# Altium PCB Demo1.PcbDoc
Units mil, origin at the board's own origin, x right, y up, seen from the top; angles counter-clockwise.
Board outline 2590 x 2195 mil, 2 copper layers (Top Layer, Bottom Layer); 9 components, 11 nets, 27 pads, 0 vias.
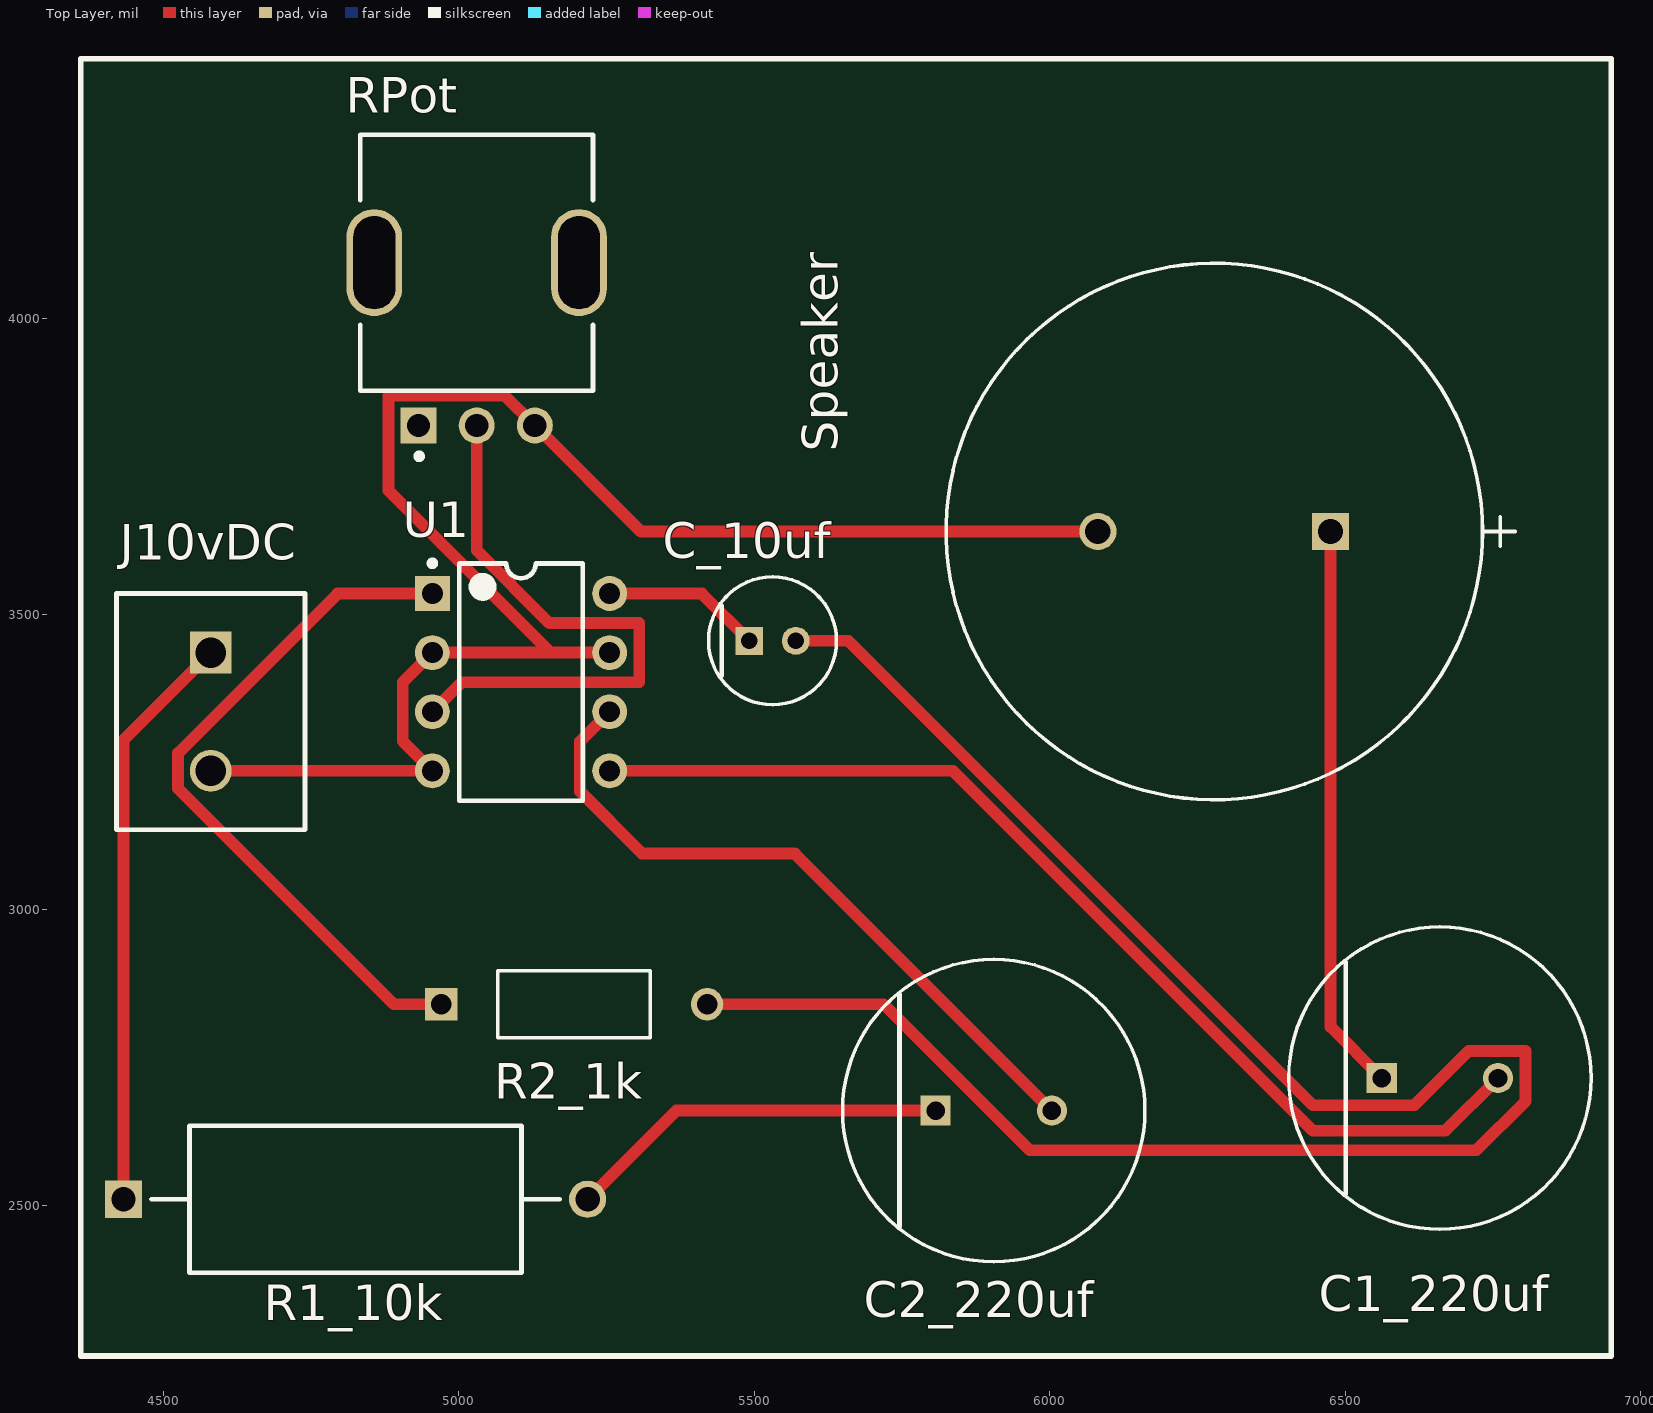
[diagram p0: Top Layer view]
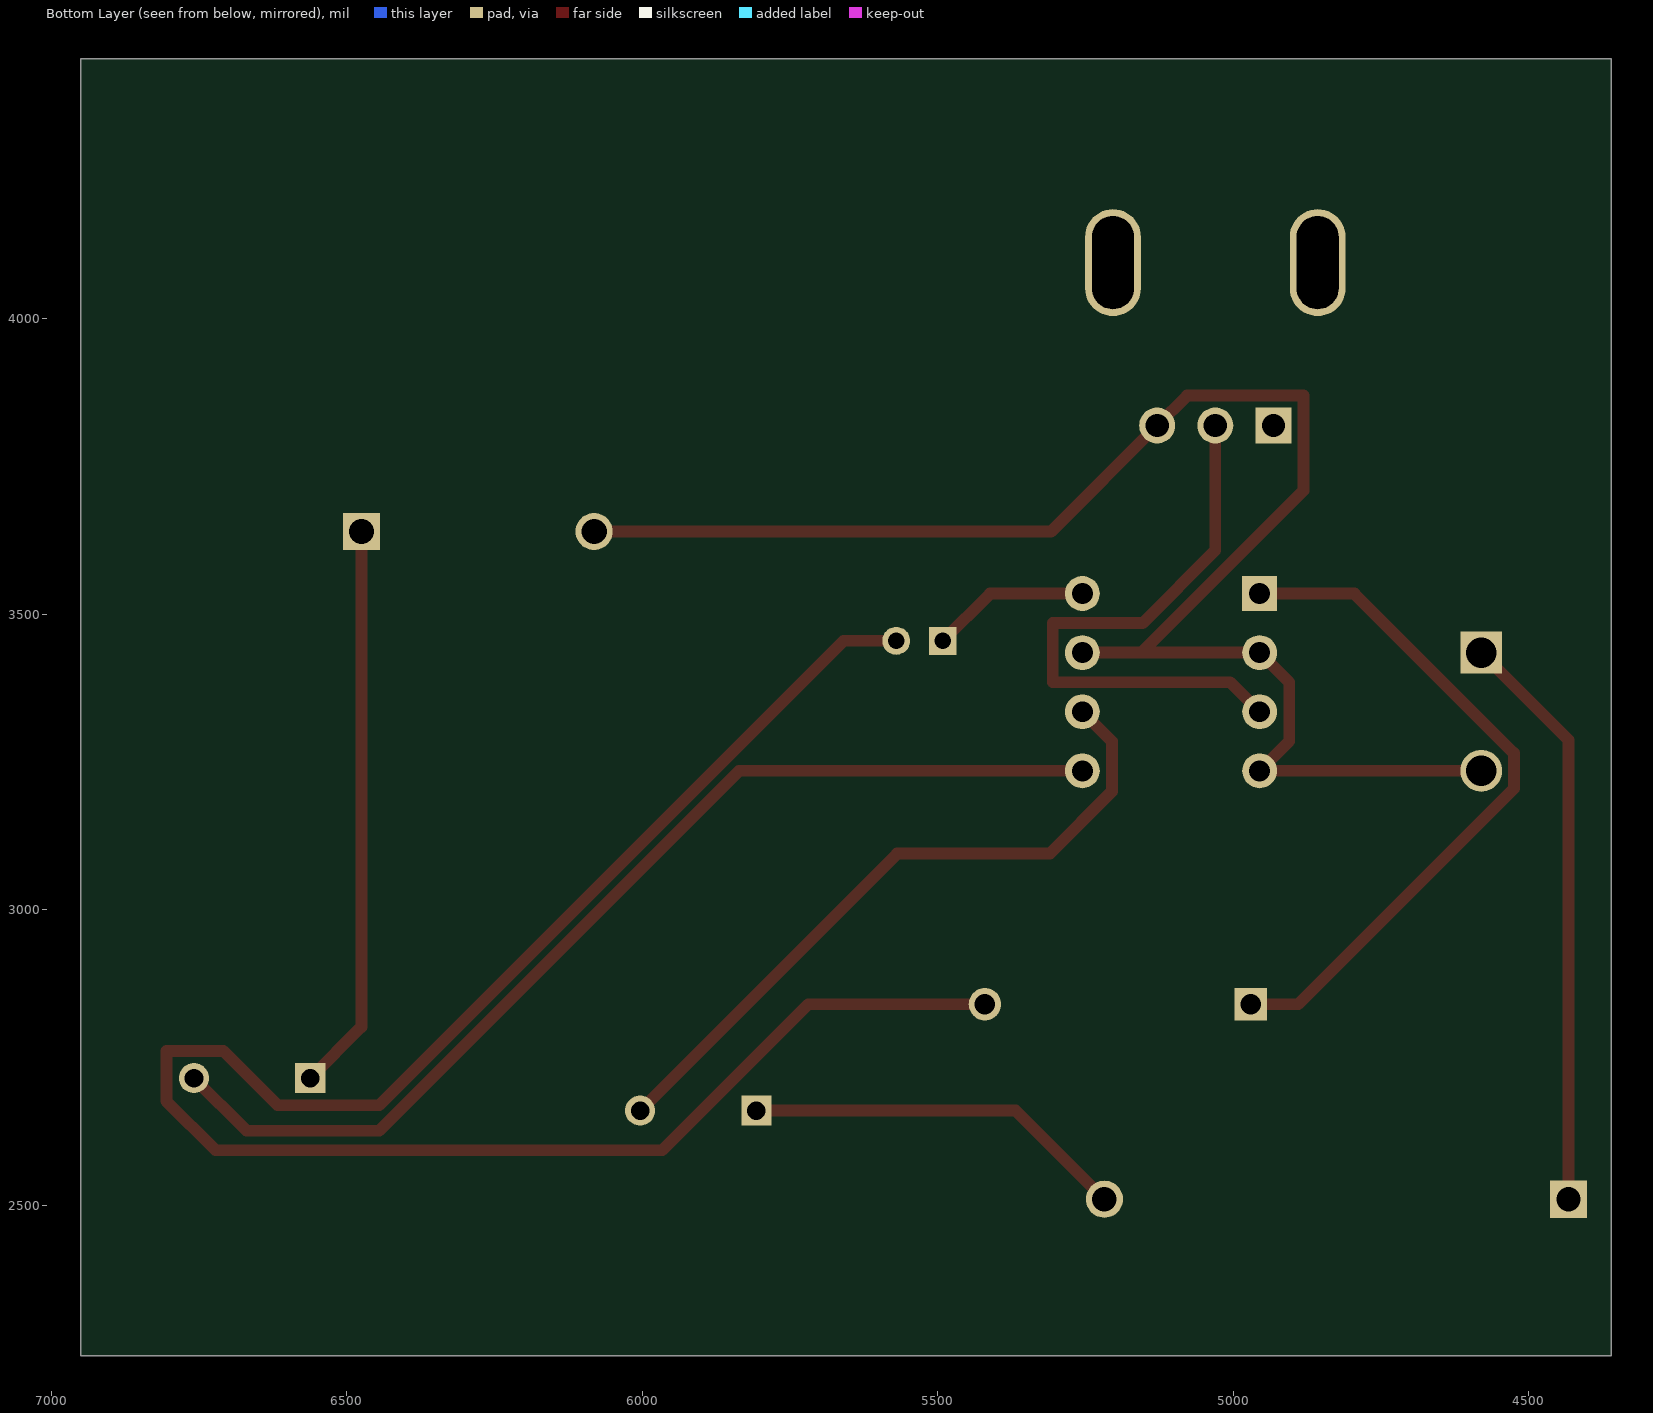
[diagram p1: Bottom Layer view, seen from below]
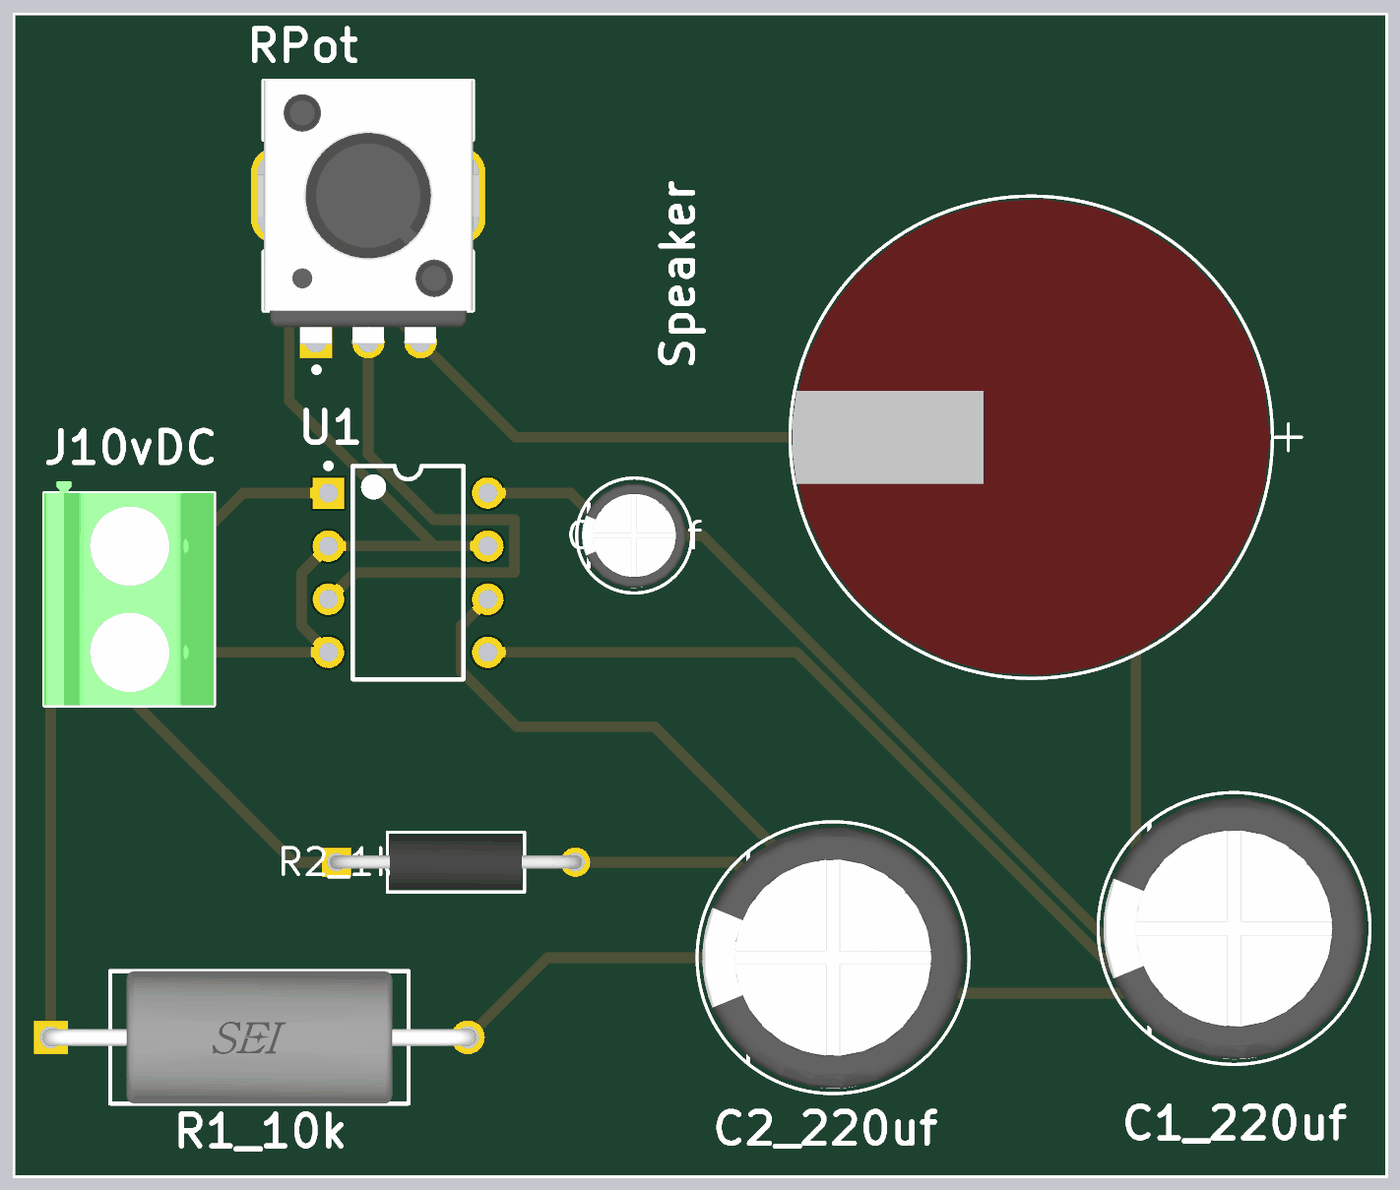
[diagram p2: 3D render of the assembled board from above, using the file's embedded part models]

## Layer stack, top to bottom
Top Solder: solder mask 0.4, Solder Resist, Dk 3.5
Top Layer: signal copper 1.4
Dielectric 1: dielectric 12.6, FR-4, Dk 4.8
Bottom Layer: signal copper 1.4
Bottom Solder: solder mask 0.4, Solder Resist, Dk 3.5

## Board outline
4360,2245 4360,4440 6950,4440 6950,2245

## Design rules (kind name [scope] priority, off if disabled: settings)
Clearance [All] p1: gap=10 ignorepadtopadclearanceinfootprint=FALSE except(0: Arc-Hole Track-Hole SMDPad-Hole THPad-Hole Via-Hole Fill-Hole Poly-Hole Region-Hole Text-Hole)
PolygonConnect [All] p1: connectstyle=Relief reliefconductorwidth=10 reliefentries=4 polygonreliefangle="90 Angle" airgapwidth=10
RoutingVias [All] p1: holewidth=28 width=50 viastyle="Through Hole" minholewidth=28 minwidth=50 maxholewidth=28 maxwidth=50
SolderMaskExpansion [All] p1: expansion=4 istentingtop=FALSE
Width [All] p1: maxlimit=20 minlimit=20 preferedwidth=20 minimp=50.000000 maximp=50.000000 favimp=50.000000
30 further rules are at their usual default settings.

## Components (designator, comment, footprint, x,y, rotation, side; value= is the part's Value field where it differs from the comment)
C1_220uf "ECA2AHG221B" FP-RAD-TH-D_12_5_0_5-L_25-MFG 6660,2715 r0 top
C2_220uf "ECA2AHG221B" FP-RAD-TH-D_12_5_0_5-L_25-MFG 5905,2660 r0 top
C_10uf "ECA1HHG100I" FP-RAD-TH-D_5_0_5-L_11_1-MFG 5530.63,3455 r0 top
J10vDC "1729128" PHOE-1729128-2_V 4580,3335 r270 top
R1_10k "SP3AJT10R0" FP-SP3A-MFG 4825,2510 r0 top
R2_1k "CF14JT1K00" STA_CF14_STP 4970,2840 r0 top
RPot "PTV09A-4225F-B103" FP-PTV09A-4-MFG 5030,4095 r0 top
Speaker "SM231508-1" SPEAK_SM231508-1_DBU 6475,3640 r180 top
U1 "LM386N-1/NOPB" P0008A 5105,3385 r0 top

## Footprints (in the part's own frame and the unit in brackets; to place one, negate y for a bottom-side part, rotate by r counter-clockwise, add the part's x,y. Pads: shape width x height; smd on the part's side, far side on the other; paste and mask are expansions set on the pad)
FP-PTV09A-4-MFG [mm]
  rect 1.55x1.55 hole 1 paste-1000 mask+0: 1(-2.5,-7)
  round 1.55 hole 1 paste-1000 mask+0: 2(0,-7) 3(2.5,-7)
  rrect100% 2.4x4.6 hole 4 slot 1.8 at 0 deg paste-1000 mask+0: 4(-4.4,0) 5(4.4,0)
  silkscreen extent -5,-8.45 5,5.5, body extent -5.8,-7.88 5.8,5.6, height 0.25
FP-RAD-TH-D_5_0_5-L_11_1-MFG [mm]
  rect 1.2x1.2 hole 0.7 paste-1000 mask+0: 1(-1,0)
  round 1.2 hole 0.7 paste-1000 mask+0: 2(1,0)
  silkscreen extent -2.75,-2.75 2.75,2.75, body extent -2.85,-2.85 2.85,2.85, height 0.25
FP-RAD-TH-D_12_5_0_5-L_25-MFG [mm]
  rect 1.3x1.3 hole 0.8 paste-1000 mask+0: 1(-2.5,0)
  round 1.3 hole 0.8 paste-1000 mask+0: 2(2.5,0)
  silkscreen extent -6.5,-6.5 6.5,6.5, body extent -6.6,-6.6 6.6,6.6, height 0.25
FP-SP3A-MFG [mm]
  rect 1.6x1.6 hole 1.05 paste-1000 mask+0: 1(-9.973,0)
  round 1.6 hole 1.05 paste-1000 mask+0: 2(9.973,0)
  silkscreen extent -8.77,-3.16 8.77,3.16, body extent -10.87,-3.26 10.87,3.26, height 0.25
P0008A [mm] "DIP, 8-Leads, Body 10.15x6.6mm, Pitch 2.54mm"
  rect 1.5x1.5 hole 0.9: 1(-3.81,3.81)
  round 1.5 hole 0.9: 2(-3.81,1.27) 3(-3.81,-1.27) 4(-3.81,-3.81) 5(3.81,-3.81) 6(3.81,-1.27) 7(3.81,1.27) 8(3.81,3.81)
  silkscreen extent -3.93,-5.1 2.65,5.23, body extent -3.95,-5.07 3.95,5.07, height 5.08
PHOE-1729128-2_V [mm] "Receptacle, 2-Leads, Body 8.1x10.16mm, Pitch 5.08mm"
  rect 1.8x1.8 hole 1.3: 1(-2.54,0)
  round 1.8 hole 1.3: 2(2.54,0)
  silkscreen extent -5.08,-4.05 5.08,4.05, body extent -5.65,-4.05 5.08,4.05, height 10.01
SPEAK_SM231508-1_DBU [mil]
  rect 63x63 hole 43 mask+0: 1(0,0)
  round 63 hole 43 mask+0: 2(393.7,0)
  silkscreen extent -312,-454 651,454, body extent -252,-449 647,449, height 316
STA_CF14_STP [mil]
  rect 55x55 hole 35 mask+0: 1(0,0)
  round 55 hole 35 mask+0: 2(450,0)
  silkscreen extent 96,-56 354,56, body extent -12,-51 462,51, height 103

## Part data
C1_220uf C2_220uf: library part CMP-05427-001770-1, "Aluminum Electrolytic Capacitors (Radial Lead Type) AEC-Q200 Qualified 220uF ±20% 100V", Capacitance=220uF, Case/Package=Radial, Max Operating Temperature=105°C, Min Operating Temperature=-55°C, Package Quantity=500, Ripple Current=440mA, Tolerance=20%, Voltage Rating=100V, Diameter=12.5mm, Height=25mm, Height - Seated (Max)=1.063inch, Lead Diameter=0.6mm, Lead Pitch=5mm, Lead/Base Style=Straight, Length=25mm, Life (Hours)=2000Hour, Mount="Through Hole", Packaging="Ammo Pack", Radiation Hardening=No, RoHS Compliant=Yes, Series=NHG, Termination=Radial, Voltage Rating (DC)=100V, Width=12.5mm
C_10uf: library part CMP-05427-000260-1, "Aluminum Electrolytic Capacitors (Radial Lead Type) AEC-Q200 Qualified 10uF ±20% 50V", Capacitance=10uF, Case/Package=Radial, Leakage Current=3uA, Max Operating Temperature=105°C, Min Operating Temperature=-55°C, Package Quantity=2000, Ripple Current=39mA, Tolerance=20%, Voltage Rating=50V, Construction=RADIAL, Contact Plating=Tin, Diameter=5mm, Height=11mm, Height - Seated (Max)=0.472inch, Lead Diameter=0.5mm, Lead Free="Lead Free", Lead Pitch=2.5mm, Lead/Base Style=Straight, Length=11mm, Life (Hours)=1000Hour, Mount="Through Hole", Packaging="Ammo Pack", Polarity=Polar, Radiation Hardening=No, RoHS Compliant=Yes, Series=NHG, Termination=Radial, Voltage Rating (DC)=50V
J10vDC: library part CMP-2000-05815-1, "PCB Terminal Block, 13.5 A, 400 V, 2-Pin THD, RoHS, Bulk", Current Rating=13500mA, Manufacturer="Phoenix Contact", Package Description="2-Pin Through Hole Device, Body 8.1 x 10.16 mm, Pitch 5.08 mm", Package Reference=1729128-2, Package Version=03/2015, Voltage Rating=400V, Datasheet URL=https://datasheet.ciiva.com/16046/1729128-16046181.pdf, Datasheet Version=12/2013, Manufacturer URL=http://www.phoenixcontact.com/, Mounting Technology=ThroughHole, No. of Positions=2, No. of Rows=1, Orientation=Horizontal, Package URL=https://www.phoenixcontact.com/online/portal/pi/pxc/product_detail_page/!ut/p/b1/3VdJjqNKFDxLH8AFycySyWY2ozFsEPOMMQaDOX1XedGL_1Vdm5YXJleknhSKeBkvI6EA8ncAo3AYoDhBQGco6KN7VURTdemj9us_IEKEZo_YHiPAEWEFmDGOHMORkqKYCORBZxgL7ZoaZYcbFFUZ3fqxSY6GOuxydWUuHqz1ynmMFygu583Bob0Ewr6Sd_l-5m-kAueHiB0jpRwZwe58wwtkpxtMYd_LmGcDRU02dRNEyWt6Y2ti5pSyJ_reIkzIulrqApdnbT11V5jnCKbYNCvhEM1MCpPByat_X379-iThf08CI5GfOPqfBeS3BRoBOdD55AKVv0iLwCMq-2BrzXWSGRH7pUGD9uwXQjiph3xL0DKQwdGa0JImiIOmBNOestqgwTHSSs2oOep-78apyXQBvNi8ZLaFjvjWvcaUEBu0MC6Wbe-d6mB0FAebo2lUWinqYaZs5DAYzV0RP9yitUjnGJ0iI9xhZkT42OCQNUJJhkgWINNQLP2JFP6OpMg3JCVg70jqHT0lvKOnhHf0lPuOnnLf0VPuWx6_dxwUIvwk5WMkT0kLL1mh61l2yZVSzG3pYV_bqo-mj6uMKwKwdnnW8Jh5RTOJzMOA5c-eJDaZQw4mTMPH02PvS_ZAqNVjVTo2WyYLkwH_KU1mmmG5kjRhDqPXLwwVHvVOjCM60-fpXvTDfMGW1PVFVS1r4e4yVDk4ZdNbkUHvqPqQSeian4UD39fNKmachqdJ1NJbyk8rXT9mXTvPk3oE5meulKGgiruPJek-4I9hTT6G8ZLOyRSm2RRVbThERQad5OS28hdt4YW4vG0stgYYzsWsK4_7y6DZMjJSCqri1kyiZR5vD7pwIrNR7QwPHTcLTI5qT7eRlpHrdGiupYlqQDJ7zy_CND8fWWBoLRXxk1RVcXiBQwbTD4Xi7KL-FuO94t9xaqweXzH, Packing=Bulk, PartNumber=1729128, Pitch=5.08mm, RoHS=TRUE
R1_10k: library part CMP-26528-000004-1, "RES 10 OHM 5% 4W AXIAL", Case/Package=Axial, Max Operating Temperature=350°C, Max Power Dissipation=4W, Min Operating Temperature=-55°C, Package Quantity=1, Resistance=10R, Resistor Type=Wirewound, Temperature Coefficient=20ppm/°C, Tolerance=5%, Diameter=5.5mm, Length=12.7mm, Mount="Through Hole", Number of Terminations=2, Packaging="Cut Tape", Power Rating=4W, RoHS Compliant=Yes, Series=SP
R2_1k: "No Description Available", Mfr_Name="Stackpole International", Copyright="Copyright (C) 2022 Ultra Librarian. All rights reserved.", Digi-Key_Part_Number_1=CF14JT1K00CT-ND, Digi-Key_Part_Number_2=CF14JT1K00TR-ND, Manufacturer_Part_Number=CF14JT1K00, RefDes=RefDes, Type=DEV
RPot: library part CMP-07234-000052-1, "POT 10K OHM 1/20W CARBON LINEAR", Max Operating Temperature=50°C, Max Power Dissipation=50mW, Min Operating Temperature=-10°C, Package Quantity=100, Resistance=10kR, Resistance Tolerance=20%, Resistor Type=Carbon, Actuator Diameter=0.236inch, Actuator Length=0.984inch, Depth=12.5mm, Height=12.5mm, Hole Diameter=9.1mm, Length=11.4mm, Military Standard=Not, Mount="Through Hole", Number of Gangs=1, Number of Turns=1, Packaging=Bulk, Power Rating=50mW, Radiation Hardening=No, REACH SVHC="No SVHC", RoHS Compliant=Yes, Series="Pro Audio PTV09", Taper=Linear, Technology="CARBON FILM", Termination=PCB, Tolerance=20%, Type=Potentiometer
Speaker: "No Description Available", Mfr_Name="DB Products Ltd", Copyright="Copyright (C) 2022 Ultra Librarian. All rights reserved.", Digi-Key_Part_Number_1=2104-SM231508-1-ND, Manufacturer_Part_Number=SM231508-1, RefDes=RefDes, Type=DEV
U1: library part CMP-0057-00052-4, "Low Voltage Audio Power Amplifier, 8-pin MDIP, Pb-Free", Manufacturer="Texas Instruments", PackageTopMarking=NSUZXYTTE#*LM*386N-1, PowerWise=N, Code_JEDEC=MS-001-BA, ComponentLink1Description="Datasheet URL", ComponentLink1URL=http://www.ti.com/general/docs/lit/getliterature.tsp?genericPartNumber=LM386&fileType=pdf, CompType="Audio IC", PackageDescription="MDIP, .365 x .250 x .130in, 8 Lead, .100in Pitch", PackageReference=P0008A, PinCount=8, RoHS=Y

## Nets (pads, with @x,y where several pads share a name; then routed paths per layer and width w, separated by ;. In a path a pad name is that pad's centre, name@x,y a point inside that pad or via, vN(x,y) a via of type N, cw(c..) or ccw(c..) an arc to the next point about the centre after c; other vN are vias at no path point)
GND: J10vDC.2 RPot.3 Speaker.2 U1.2 U1.4 U1.7 | length 2760.5
  Top Layer w20: J10vDC.2 U1.4 4905,3285 4905,3385 U1.2 5155,3435 ; U1.7 5155,3435 ; Speaker.2 5307.84,3640 RPot.3 5077.84,3870 4881,3870 4881,3709 5155,3435
NetAudioInput_1A: RPot.1
NetC1_220uf_1: C1_220uf.1 Speaker.1 | length 960.9
  Top Layer w20: Speaker.1 6475,2801.57 C1_220uf.1
NetC1_220uf_2: C1_220uf.2 U1.5 | length 1792.5
  Top Layer w20: U1.5 5836,3235 6445,2626 6669.43,2626 C1_220uf.2
NetC2_220uf_1: C2_220uf.1 R1_10k.2 | length 651.1
  Top Layer w20: R1_10k.2 5367.64,2660 C2_220uf.1
NetC2_220uf_2: C2_220uf.2 U1.6 | length 1177.8
  Top Layer w20: U1.6 5205,3285 5205,3200 5310,3095 5568.43,3095 C2_220uf.2
NetC_10uf_1: C_10uf.1 U1.8 | length 269.4
  Top Layer w20: U1.8 5411.26,3535 C_10uf.1
NetC_10uf_2: C_10uf.2 R2_1k.2 | length 3205.4
  Top Layer w20: R2_1k.2 5719,2840 5966,2593 6722,2593 6805,2676 6805,2761 6709,2761 6617,2669 6445,2669 5659,3455 C_10uf.2
NetJ10vDC_1: J10vDC.1 R1_10k.1 | length 986.2
  Top Layer w20: R1_10k.1 4432.36,3287.36 J10vDC.1
NetR2_1k_1: R2_1k.1 U1.1 | length 1198.9
  Top Layer w20: U1.1 4794.57,3535 4524.57,3265 4524.57,3205 4889.57,2840 R2_1k.1
NetRPot_2: RPot.2 U1.3 | length 1008.1
  Top Layer w20: U1.3 5005,3385 5305,3385 5305,3485 5153,3485 5030,3608 RPot.2
pads on no net: RPot.4 RPot.5

## Silkscreen, mask and mechanical layers (free items; w line width, h text height)
Top Overlay:
  the board outline again, w10
Mechanical 1:
  the board outline again, w47.24